# EAGLE board cc1200layout (EAGLE 6.4)
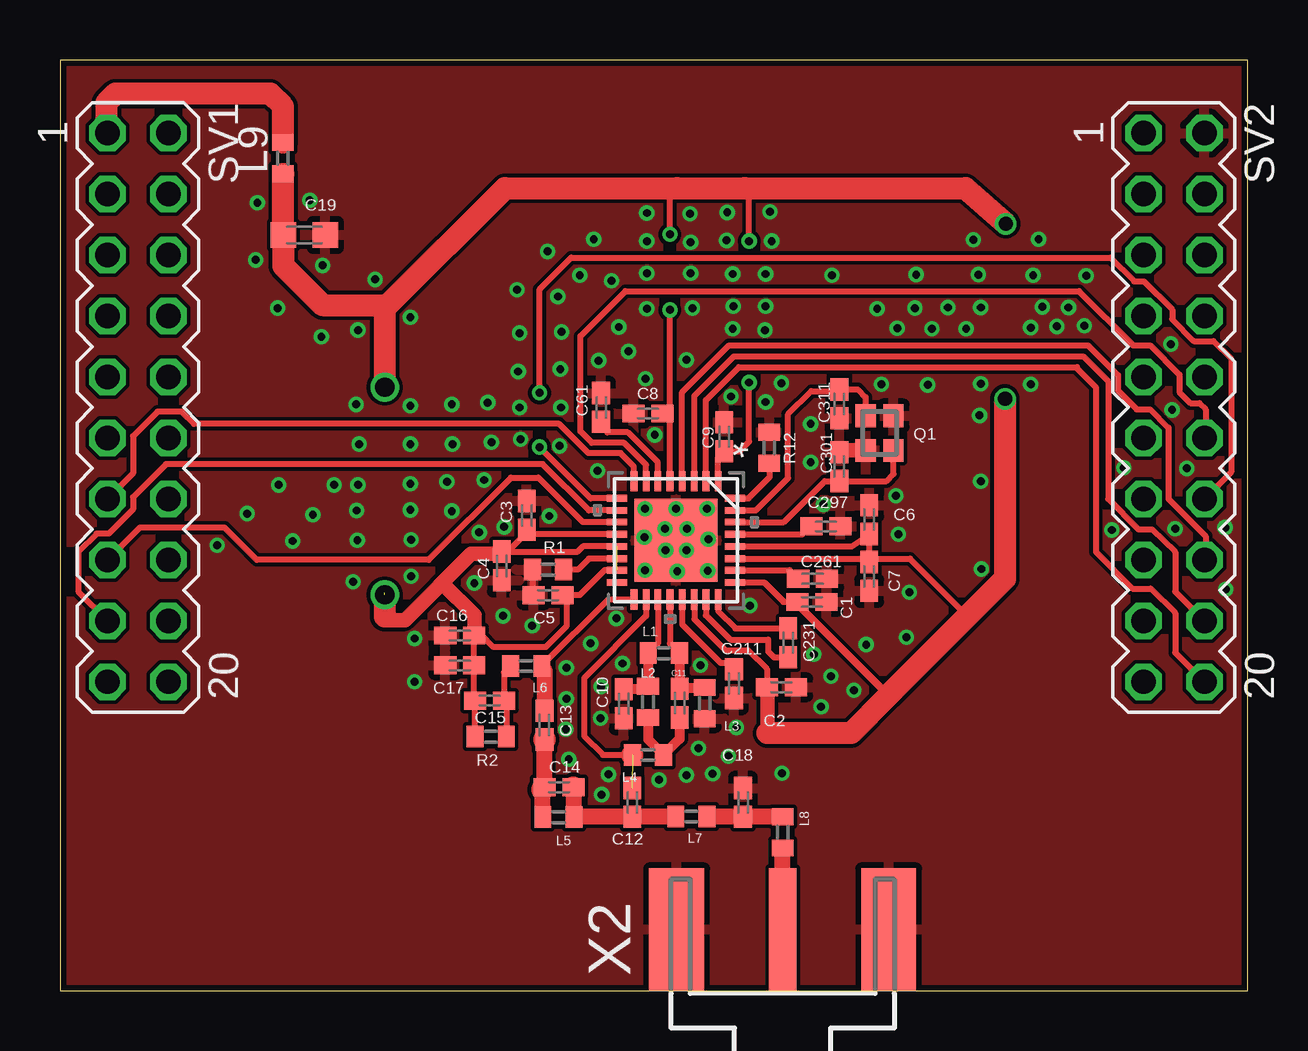
[diagram p0: board, top side]
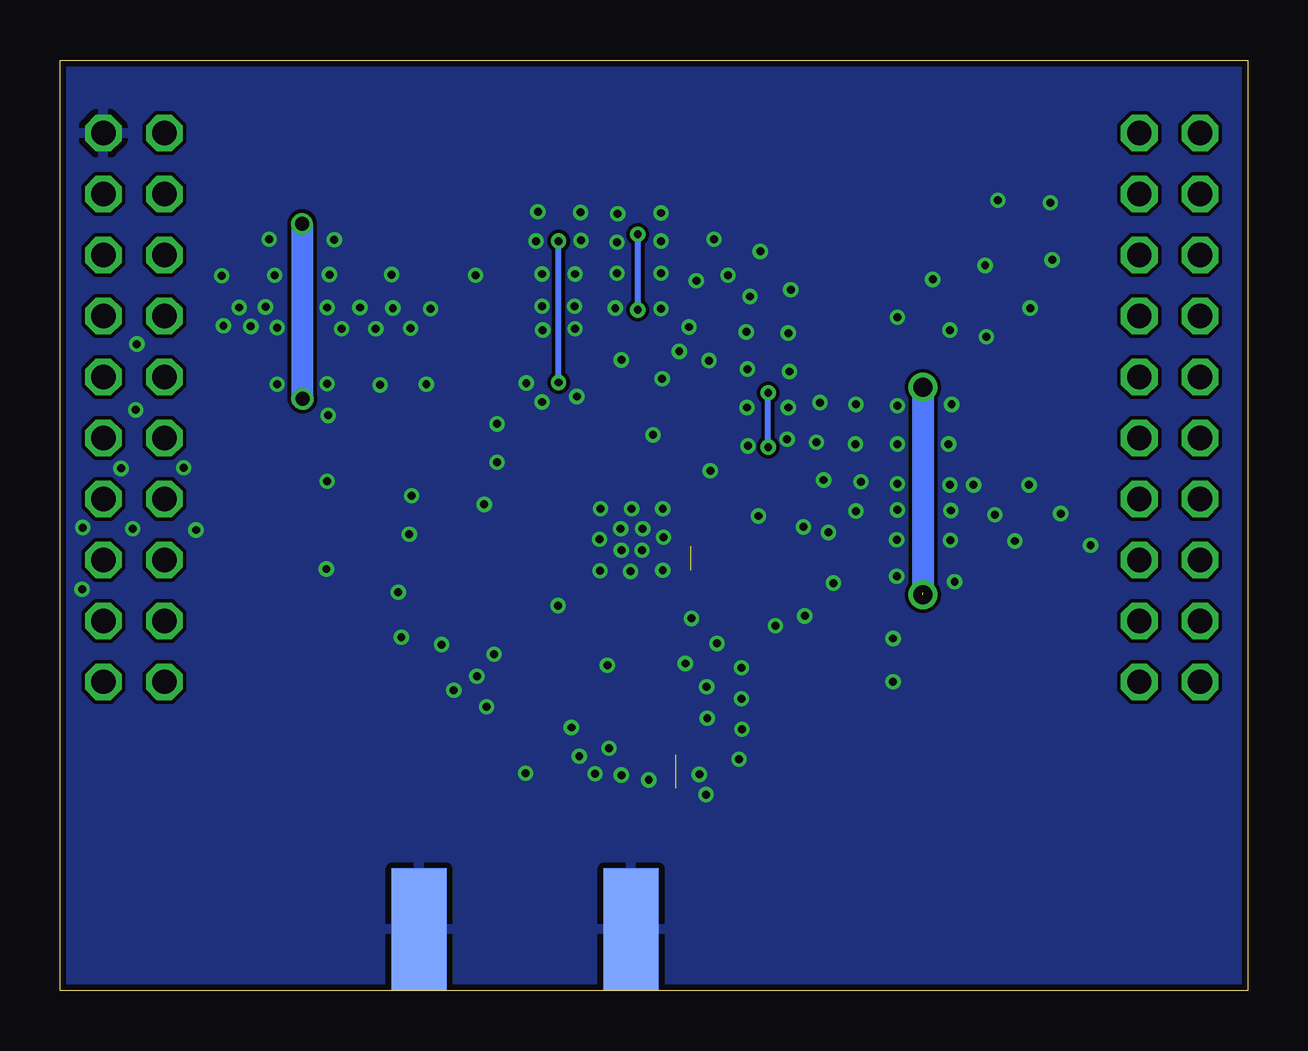
[diagram p1: board, bottom side, seen from below]

Size 49.51 x 38.79 mm. Coordinates in mm from the lower left corner, seen from the top.
Outline: 0,0 49.51,0 49.51,38.79 0,38.79 0,0
Copper layers (1*16): Top 0.035mm / dielectric 0.8mm / Bottom 0.035mm
Design rules "Elecrow_2-layer_eagle_rule *": minimum track width 6mil, minimum drill 12mil, track to track 6mil, track to pad 6mil, pad to pad 6mil, via to via 6mil, smd to smd 0mil, copper to edge 10mil, drill to drill 10mil, minimum pad ring 10mil, minimum via ring 6mil, stop-mask expansion 2mil, vias tented up to drill 100mil, thermal gap 10mil
Net classes: 0 default: width 0.152 mm, drill 0.33 mm, clearance 0.152 mm

## Footprints (pad centres in the part's own frame; a part is rotated, then mirrored left to right if it is on the bottom)
C0402K = smd 0.925 x 0.74: 1 -0.6,0; 2 0.6,0
C0603K = smd 1.05 x 1.08: 1 -0.875,0; 2 0.875,0
C0402 = smd 0.7 x 0.9: 1 -0.65,0; 2 0.65,0
0402 = smd 0.7 x 0.9: 1 -0.65,0; 2 0.65,0
FA-128 = smd 0.95 x 0.85: 1 -0.725,-0.575; 2 0.725,-0.575; 3 0.725,0.575; 4 -0.725,0.575
R0402 = smd 0.7 x 0.9: 1 -0.65,0; 2 0.65,0
MA10-2 = drill 1.016 octagon: 1 -11.43,-1.27; 2 -11.43,1.27; 3 -8.89,-1.27; 4 -8.89,1.27; 5 -6.35,-1.27; 6 -6.35,1.27; 7 -3.81,-1.27; 8 -3.81,1.27; 9 -1.27,-1.27; 10 -1.27,1.27; 11 1.27,-1.27; 12 1.27,1.27; 13 3.81,-1.27; 14 3.81,1.27; 15 6.35,-1.27; 16 6.35,1.27; 17 8.89,-1.27; 18 8.89,1.27; 19 11.43,-1.27; 20 11.43,1.27
RHB32_3P45X3P45 = smd 0.838 x 0.279: 1 -2.464,1.753; 2 -2.464,1.245; 3 -2.464,0.762; 4 -2.464,0.254; 5 -2.464,-0.254; 6 -2.464,-0.762; 7 -2.464,-1.245; 8 -2.464,-1.753; 17 2.464,-1.753; 18 2.464,-1.245; 19 2.464,-0.762; 20 2.464,-0.254; 21 2.464,0.254; 22 2.464,0.762; 23 2.464,1.245; 24 2.464,1.753 | smd 0.279 x 0.838: 9 -1.753,-2.464; 10 -1.245,-2.464; 11 -0.762,-2.464; 12 -0.254,-2.464; 13 0.254,-2.464; 14 0.762,-2.464; 15 1.245,-2.464; 16 1.753,-2.464; 25 1.753,2.464; 26 1.245,2.464; 27 0.762,2.464; 28 0.254,2.464; 29 -0.254,2.464; 30 -0.762,2.464; 31 -1.245,2.464; 32 -1.753,2.464 | smd 3.454 x 3.454: 33 0,0
J502-ND-142-0701-881/886 = smd 5.08 x 1.143: 1 2.565,0 | smd 5.08 x 2.286: G@1 2.565,4.42; G@2 2.565,-4.42 | smd 5.08 x 2.286 bottom: G@3 2.565,4.42; G@4 2.565,-4.42

## Placement (x,y rotation side)
C1  47nF  [C0402K]  31.34,16.21 0 top
C2  47nF  [C0402K]  30.07,12.65 0 top
C3  47nF  [C0402K]  19.46,19.81 90 top
C4  47nF  [C0402K]  18.41,17.7 270 top
C5  47nF  [C0402K]  20.35,16.48 180 top
C6  47nF  [C0402K]  33.73,19.63 90 top
C7  47nF  [C0402K]  33.73,17.27 270 top
C8  47nF  [C0402K]  24.51,24.05 180 top
C9  47nF  [C0402K]  27.69,23.09 90 top
C10  5.1pF  [C0402K]  23.5,11.96 270 top
C11  5.1pF  [C0402K]  25.83,11.99 270 top
C12  5.1pF  [C0402K]  23.85,7.85 270 top
C13  39pF  [C0402K]  20.19,11.07 270 top
C14  2.2pF  [C0402K]  20.8,8.48 0 top
C15  56pF  [C0402K]  17.91,12.09 0 top
C16  10nF  [C0402K]  16.66,14.81 180 top
C17  100pF  [C0402K]  16.66,13.56 180 top
C18  6.2pF  [C0402K]  28.47,7.85 90 top
C19  2.2uF  [C0603K]  10.19,31.5 0 top
C61  220nF  [C0402K]  22.56,24.31 90 top
C211  10nF  [C0402K]  28.09,12.8 270 top
C231  1.5n  [C0402K]  30.35,14.5 90 top
C261  47nF  [C0402K]  31.37,17.17 0 top
C297  47nF  [C0402K]  31.93,19.35 0 top
C301  6pF  [C0402K]  32.49,21.84 90 top
C311  6pF  [C0402K]  32.49,24.46 270 top
L1  56nH  [C0402]  25.17,14.07 0 top
L2  27nH  [C0402]  24.51,12.04 270 top
L3  27nH  [C0402]  26.87,11.99 270 top
L4  15nH  [C0402]  24.51,9.83 180 top
L5  15nH  [C0402]  20.78,7.24 0 top
L6  27nH  [C0402]  19.43,13.54 180 top
L7  43nH  [C0402]  26.31,7.26 0 top
L8  22nH  [C0402]  30.12,6.6 270 top
L9  BLM15HG102SN1  [0402]  9.3,34.7 90 top
Q1  FA-128  [FA-128]  34.16,23.24 90 top
R1  56k  [R0402]  20.35,17.55 0 top
R2  18  [R0402]  17.96,10.59 180 top
R12  0  [R0402]  29.57,22.63 270 top
SV1  [MA10-2]  3.25,24.31 270 top
SV2  [MA10-2]  46.43,24.31 270 top
U$1  CC1200  [RHB32_3P45X3P45]  25.68,18.77 270 top
X2  SMA-142-0701-881/886  [J502-ND-142-0701-881/886]  30.12,0 90 top

## Library data of the parts
C1-C19 C61 C211 C231 C261 C297 C301 C311 R1 R2 R12 = resistor
L1-L8 = SparkFun-Passives
L9 = inductors
Q1 = crystal
SV1 SV2 = con-lstb; OC_FARNELL: unknown; OC_NEWARK: unknown
U$1 = cc1200
X2 = con-coax; MF: JOHNSON COMPONENTS; MPN: 142-0701-881; OC_FARNELL: 1608603; OC_NEWARK: 08B906

## Nets
GND: C1.2 C2.2 C3.2 C4.2 C5.2 C6.2 C7.2 C8.2 C9.2 C10.2 C16.2 C17.2 C18.2 C19.2 C61.2 C211.2 C261.2 C297.2 C301.2 C311.2 L3.2 Q1.2 Q1.4 R1.1 R12.1 SV2.2 U$1.33 X2.G@1 X2.G@2 X2.G@3 X2.G@4
N$1: SV2.12 U$1.7
N$2: SV1.13 U$1.8
N$3: SV2.14 U$1.9
N$4: SV1.17 U$1.10
N$5: SV1.15 U$1.11
N$6: C231.1 U$1.23
N$7: C231.2 U$1.24
N$8: C211.1 U$1.21
N$9: C261.1 U$1.26
N$10: C297.1 U$1.29
N$11: C61.1 U$1.6
N$12: R1.2 U$1.14
N$13: R12.2 U$1.32
N$14: C311.1 Q1.3 U$1.31
N$15: SV2.16 U$1.4
N$16: SV2.18 U$1.3
N$17: SV2.20 U$1.2
N$18: C301.1 Q1.1 U$1.30
N$19: C10.1 L1.1 L2.1 U$1.19
N$20: C11.1 L1.2 L3.1 U$1.20
N$21: L9.2 SV1.1
N$22: C13.1 L6.1 U$1.17
N$23: C11.2 L2.2 L4.1
N$24: C12.1 L4.2 U$1.18
N$25: C13.2 C14.1 L5.1
N$26: C12.2 C14.2 L5.2 L7.1
N$27: C15.2 L6.2 R2.1
N$31: C18.1 L7.2 L8.1
N$32: L8.2 X2.1
VDD: C1.1 C2.1 C3.1 C4.1 C5.1 C6.1 C7.1 C8.1 C9.1 C15.1 C16.1 C17.1 C19.1 L9.1 R2.2 U$1.1 U$1.5 U$1.12 U$1.13 U$1.15 U$1.22 U$1.25 U$1.27 U$1.28

## Tracks (layer width: path | path; a pad name or v marks a point on that pad's centre or on a via)
GND  (via drill 0.33)
  Top 0.254: R1.1 19.7,16.54 C5.2
  Top 0.61: Q1.4 32.56,22.52 C301.2
  other vias: 23.7,26.64 22.4,21.67 24.79,23.16 18.47,15.62 22.12,14.48 19.68,15.21 22.56,12.67 22.53,11.35 23.19,15.52 21.11,13.46 28.75,16.05 31.29,23.62 31.29,22.02 23.44,13.64 20.85,25.91 20.88,24.31 19.15,24.31 17.98,22.86 30.07,25.32 27.97,24.77 29.41,24.54 11.43,21.08 9.12,21.08 9.7,18.75 6.55,18.57 7.8,19.89 10.54,19.84 20.4,19.79 24.41,25.5 31.83,20.27 31.42,14.02 31.72,11.84 33.1,12.52 32.13,13.11 33.6,14.43 35.41,16.61 35.28,14.73 34.95,19.02 24.38,17.53 24.38,20.09 26.97,20.09 27,17.5 24.36,18.9 27.03,18.82 25.68,20.09 25.73,17.48 25.22,19.25 25.25,18.36 26.11,18.36 26.14,19.25 12.47,22.78 14.61,22.78 14.61,24.38 12.34,24.43 14.61,21.13 14.61,20.04 14.63,18.8 14.63,17.27 12.22,17.04 12.4,18.77 12.42,21.08 26.29,31.19 24.46,31.24 26.29,29.9 24.46,29.9 24.46,28.42 26.37,28.45 26.7,13.56 38.07,31.29 40.79,31.32 38.28,29.84 40.56,29.82 40.46,27.64 40.94,28.5 38.38,28.47 37.77,27.58 37.01,28.47 36.35,27.58 35.64,28.45 34.9,27.61 38.38,25.3 40.46,25.27 41.55,27.69 42.04,28.47 42.7,27.71 42.77,29.79 35.69,29.84 32.18,29.82 34.06,28.42 21.11,12.17 21.08,10.9 21.21,9.65 22.58,8.18 22.86,9.02 24.97,8.79 30.1,9.07 26.11,8.99 34.85,20.62 34.24,25.27 36.17,25.25 38.33,23.98 38.38,21.23 38.4,17.58 26.62,10.11 28.19,10.97 27.86,9.78 27.2,9.04 18.52,19.33 17.48,19.1 46.3,26.95 46.96,21.77 46.48,19.25 44.35,21.79 46.35,24.21 43.84,19.2 17.27,16.99 22.45,26.26 23.29,27.66 20.75,28.93 21.67,29.82 20.9,27.46 22.99,29.59 26.11,26.29 28.04,27.58 20.83,22.71 19.2,22.99 28.07,28.52 29.41,28.52 29.39,27.53 29.41,29.87 28.04,29.87 29.67,31.24 27.79,31.27 27.81,32.44 29.59,32.46 14.78,14.68 14.78,12.88 48.59,16.74 48.56,19.3 24.46,32.41 26.26,32.38 10.95,30.23 10.41,32.94 8.23,32.84 8.15,30.45 9.07,28.45 10.9,27.25 12.42,27.53 13.13,29.64 14.61,28.07 12.37,20.02 17.68,21.29 16.33,19.99 16.13,21.21 16.36,22.78 16.33,24.43 17.83,24.51 19.1,25.81 19.15,27.41 19.05,29.21 20.32,30.81 22.25,31.32
  pour Top: -2.54,55.88 54.61,55.88 54.61,-3.81 -2.54,-3.81
  pour Bottom: -3.81,59.69 55.88,59.69 55.88,-2.54 -3.81,-2.54
N$1
  Top 0.254: U$1.7 24.43,21.92 23.52,22.84 22.17,22.84 21.69,23.32 21.69,27.28 23.57,29.16 42.47,29.16 44.73,26.9 45.44,26.9 46.66,25.68 46.66,24.94 47.12,24.49 47.5,24.49 47.75,24.23 47.75,23.09 SV2.12
N$2
  Top 0.254: U$1.8 23.93,21.84 23.37,22.4 22.02,22.4 20.8,23.62 5.59,23.62 5.08,24.13 4.06,24.13 3.05,23.11 3.05,21.57 SV1.13
N$3  (via drill 0.33)
  Top 0.254: U$1.9 22.12,20.52 v19.99,22.66 | v19.99,24.92 19.99,29.23 21.31,30.56 43.79,30.56 44.78,29.57 45.19,29.57 46.35,28.4 46.35,27.99 47.27,27.08 48.08,27.08 48.82,26.34 48.82,21.61 SV2.14
  Bottom 0.254: v19.99,22.66 v19.99,24.92
N$4
  Top 0.254: U$1.10 22.05,20.02 20.12,21.95 4.42,21.95 3.05,20.57 3.05,20.07 2.03,19.05 1.52,19.05 0.76,18.29 0.76,16.64 SV1.17
N$5
  Top 0.254: U$1.11 21.79,19.53 19.94,21.39 18.8,21.39 15.37,17.96 8.2,17.96 6.86,19.3 3.33,19.3 SV1.15
N$6
  Top 0.254: U$1.23 26.92,15.65 27.94,14.63 29.52,14.63 29.52,14.15 29.77,13.89 C231.1
N$7
  Top 0.254: U$1.24 27.43,15.82 28.15,15.1 C231.2
N$8
  Top 0.254: U$1.21 25.93,15.27 27.53,13.66 27.83,13.66 C211.1
N$9
  Top 0.254: U$1.26 30.41,17.53 C261.1
N$10
  Top 0.254: U$1.29 30.95,19.02 C297.1
N$11
  Top 0.254: U$1.6 24.92,22.02 23.67,23.27 22.82,23.27 C61.1
N$12
  Top 0.254: U$1.14 22.05,18.01 21.59,17.55 R1.2
N$13
  Top 0.254: U$1.32 28.7,20.52 29.59,21.41 29.59,21.93 R12.2
N$14
  Top 0.254: U$1.31 29.01,20.02 30.35,21.36 30.35,24.03 31.32,24.99 32.42,24.99 C311.1 33.26,25.06 33.58,24.74 Q1.3
N$15
  Top 0.254: U$1.4 25.93,24.94 27.89,26.9 42.85,26.9 44.09,25.65 44.09,25.02 44.88,24.23 45.44,24.23 46.2,23.47 46.2,20.5 47.75,18.95 47.75,18.01 SV2.16
N$16
  Top 0.254: U$1.3 26.44,24.79 28.09,26.44 42.65,26.44 43.69,25.4 43.69,20.5 44.96,19.23 45.52,19.23 46.48,18.29 46.48,16.64 SV2.18
N$17
  Top 0.254: U$1.2 26.92,24.61 28.3,25.98 42.39,25.98 42.39,25.93 43.18,25.15 43.18,18.29 44.7,16.76 45.47,16.76 46.48,15.75 46.48,14.1 SV2.20
N$18
  Top 0.254: U$1.30 30.18,19.53 31.88,21.23 32.48,21.23 C301.1 34.45,21.24 34.75,21.54 34.75,22.51 Q1.1
N$19
  Top 0.254: U$1.19 24.92,14.47 L1.1
  Top 0.406: L1.1 L2.1 24.39,12.56 C10.1
N$20
  Top 0.254: U$1.20 25.43,14.47 L1.2
  Top 0.406: L1.2 25.83,14.06 C11.1 25.88,12.64 L3.1
N$21
  Top 0.914: L9.2 9.3,36.85 8.76,37.39 2.31,37.39 1.93,37.01 1.93,35.79 SV1.1
N$22
  Top 0.254: L6.1 20.22,13.4 20.19,13.38 | U$1.17 22.85,16.31 L6.1 | 20.19,13.43 L6.1
  Top 0.66: 20.19,13.38 C13.1
N$23
  Top 0.406: C11.2 25.83,10.5 L4.1 24.51,10.48 L2.2
N$24  (1 unrouted)
  Top 0.254: U$1.18 24.43,15.62 21.84,13.03 21.84,10.62 22.63,9.83 L4.2
  Top 0.914: L4.2
N$25
  Top 0.66: L5.1 20.1,8.38 | C14.1 20.2,10.46
  Top 0.914: 20.1,8.38 C14.1 | 20.2,10.46 C13.2
N$26
  Top 0.66: L7.1 23.87,7.26 C12.2 L5.2 21.43,8.46 C14.2
  Top 0.914: C14.2
N$27
  Top 0.254: R2.1 18.61,11.99 C15.2 18.51,13.26 L6.2
N$31
  Top 0.66: L8.1 C18.1 26.98,7.25 L7.2
N$32
  Top 0.66: X2.1 L8.2
VDD  (via drill 0.33, 0.58, 0.8)  (2 unrouted)
  Top 0.254: U$1.15 22.71,17.53 21.67,16.48 C5.1 21.02,16.41 21.11,16.41 21.11,15.19 20.24,14.33 18.06,14.33 17.58,14.81 C16.1 C17.1 17.26,12.13 C15.1 R2.2 | U$1.13 21.79,18.52 21.58,18.3 C4.1 18.54,18.34 18.52,18.36 18.72,18.36 19.41,19.05 19.41,19.16 C3.1 19.64,19.02 U$1.12 | C8.1 25.43,23.74 U$1.5 v25.43,28.37 | C9.1 27.43,22.23 U$1.1 27.43,22.2 27.71,22.48 28.32,22.48 28.73,22.89 v28.73,25.35 | U$1.28 33.01,18.52 C6.1 C7.1 33.65,18.01 U$1.27 35.43,18.01 37.83,15.61 | 30.18,16.2 30.15,16.2 29.34,17.02 U$1.25 29.36,17.02 30.18,16.2 | 30.18,16.2 C1.1 | U$1.22 26.44,15.49 27.74,14.2 28.68,14.2 29.46,13.41 C2.1 29.49,12.63 | 13.56,15.44 13.54,15.6 | v25.43,31.52 25.43,33.15 25.73,33.45 | 34.34,12.55 30.86,16.03 30.86,16.09 C1.1 | C1.1 30.68,16.13 34.52,12.29 | v28.73,31.24 28.73,33.27 28.55,33.45
  Top 0.61: 29.49,10.74 29.49,12.63 | C4.1 18.32,18.21 17.14,18.21 14.38,15.44 13.56,15.44 | 15.93,16.99 17.27,15.65 17.27,14.96 17.26,14.95 C16.1
  Top 0.914: 13.54,28.57 10.95,28.57 9.31,30.21 C19.1 9.31,34.03 L9.1 | 13.54,28.57 13.66,28.57 18.54,33.45 25.73,33.45 28.55,33.45 37.74,33.45 v39.42,31.95 | v39.4,24.66 39.4,17.17 37.83,15.61 34.52,12.29 32.97,10.74 29.49,10.74 | 13.54,28.57 v13.54,25.15 | v13.54,16.51 13.54,15.6
  Bottom 0.254: v25.43,28.37 v25.43,31.52 | v28.73,25.35 v28.73,31.24
  Bottom 0.914: v39.42,31.95 39.42,24.69 v39.4,24.66 | v13.54,25.15 13.54,16.59